# Altium PCB CH382SSP.PcbDoc
Units mil, origin at the board's own origin, x right, y up, seen from the top; angles counter-clockwise.
Board outline 3084.87 x 2354.36 mil, 2 copper layers (TopLayer, BottomLayer); 63 components, 93 nets, 329 pads, 141 vias.
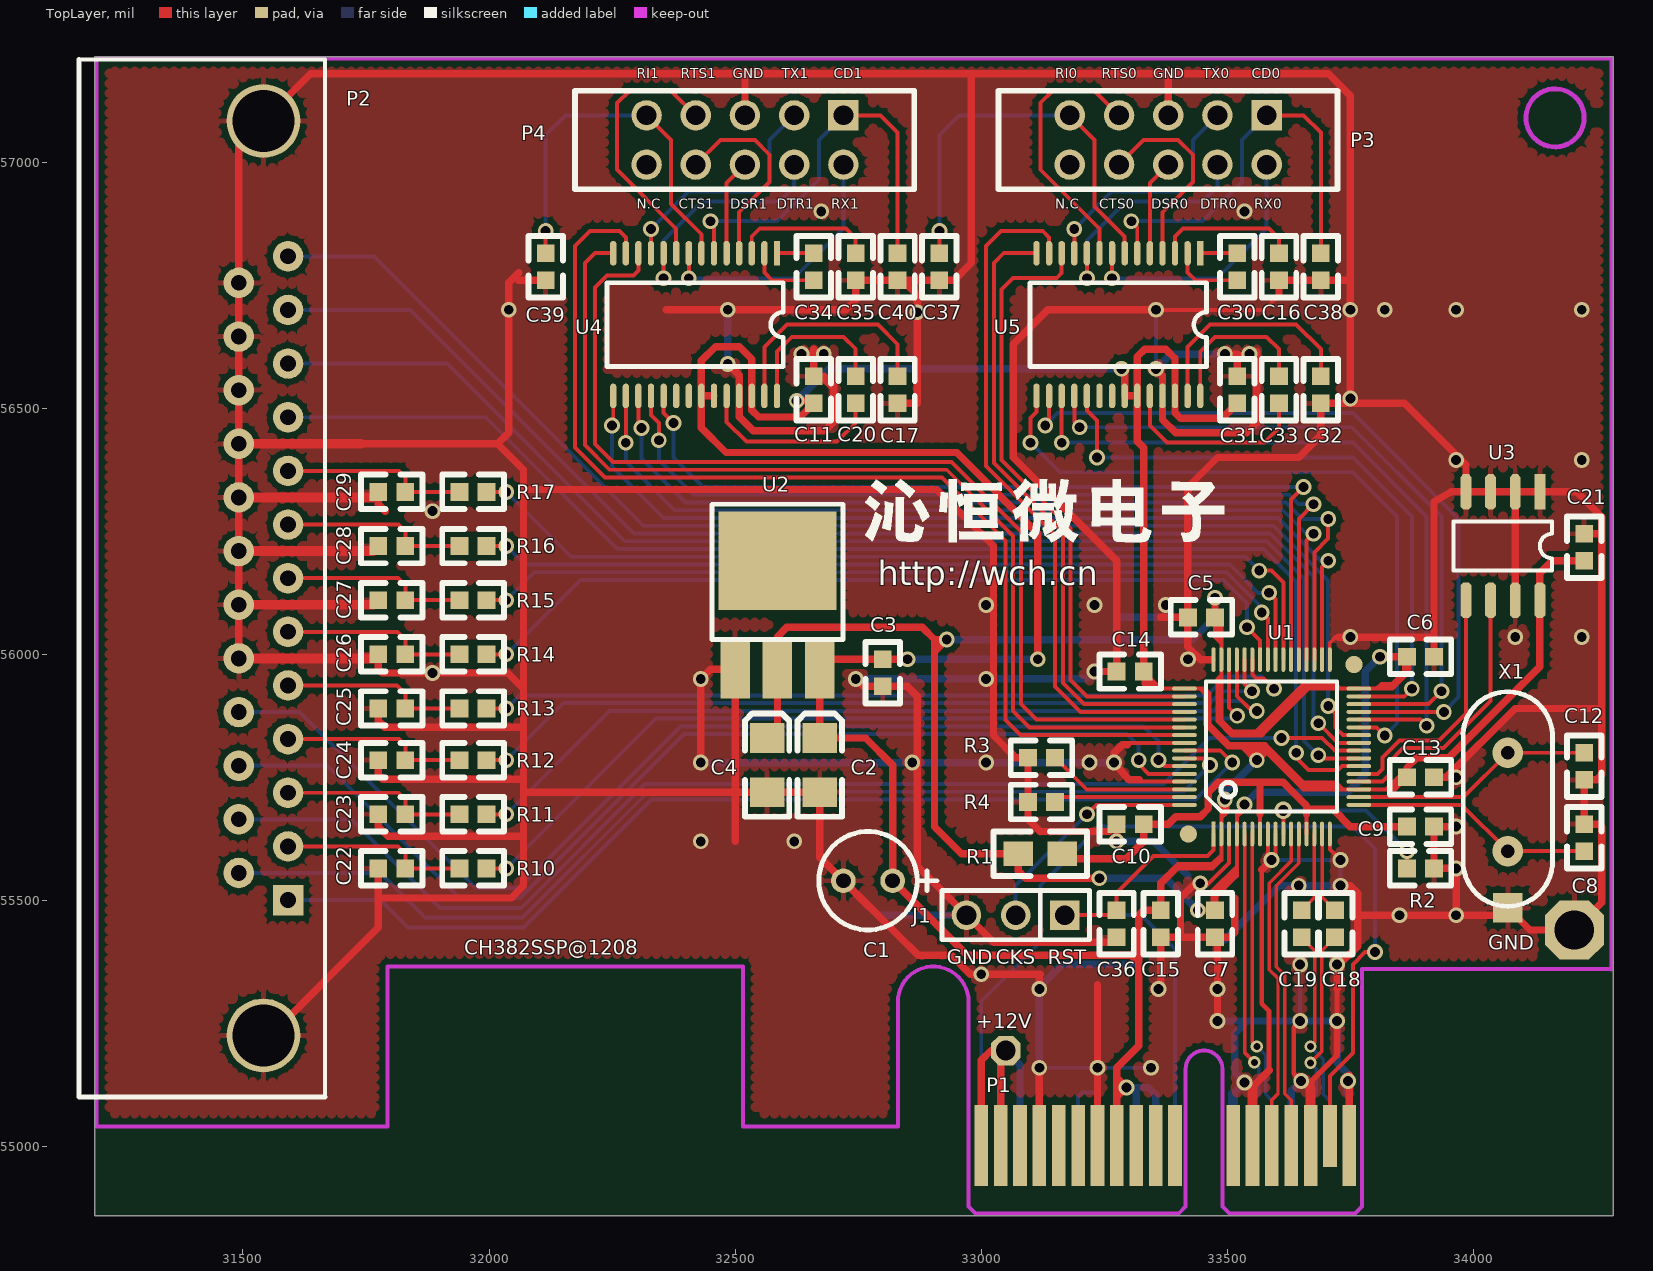
[diagram p0: TopLayer view]
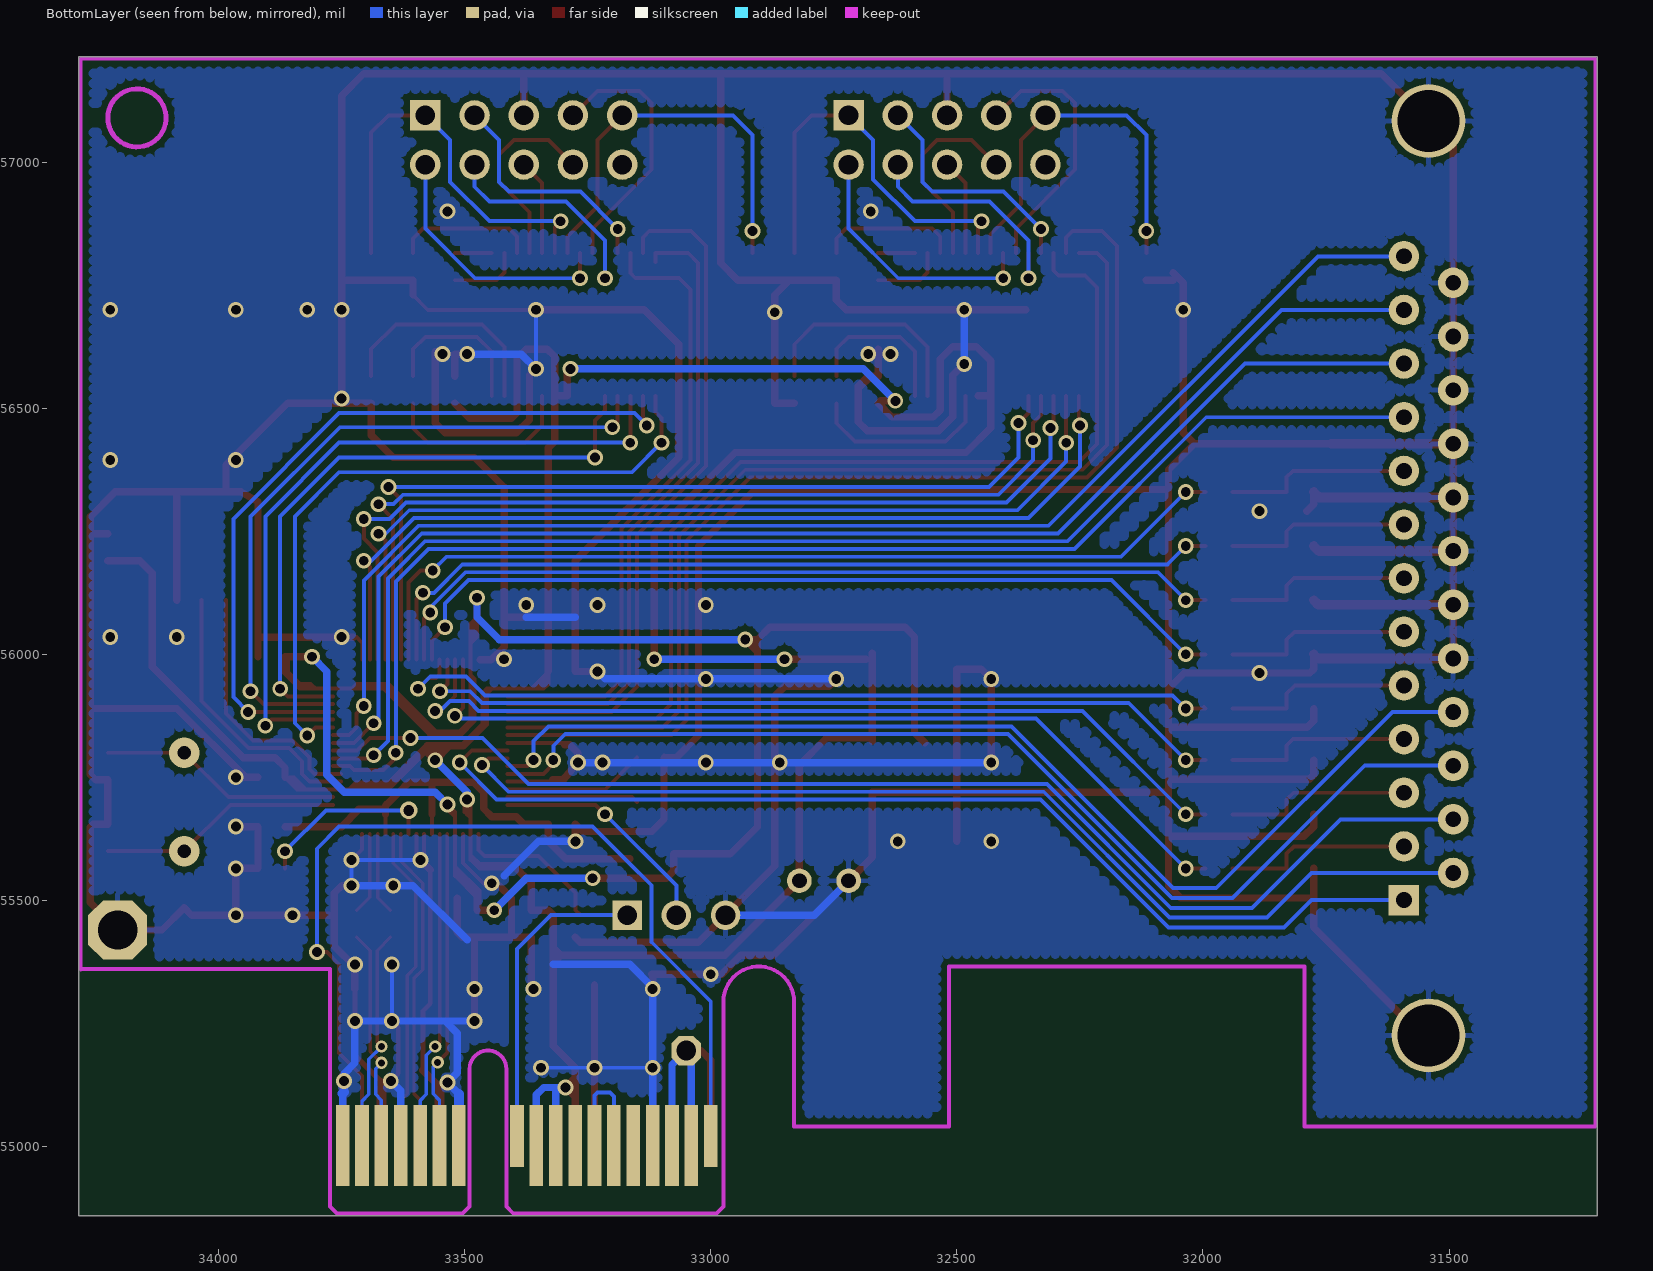
[diagram p1: BottomLayer view, seen from below]

## Layer stack, top to bottom
TopSolder: solder mask 0.4, Solder Resist, Dk 3.5
TopLayer: signal copper 1.4
Dielectric1: dielectric 12.6, FR-4, Dk 4.8
BottomLayer: signal copper 1.4
BottomSolder: solder mask 0.4, Solder Resist, Dk 3.5

## Board outline
31199.06,54859.57 34283.94,54859.57 34283.94,57213.94 31199.06,57213.94

## Design rules (kind name [scope] priority, off if disabled: settings)
Clearance Clearance_4 [(InPoly) vs InNetClass('PARTS')] p1: gap=12 ignorepadtopadclearanceinfootprint=FALSE
Clearance Clearance_2 [All vs InNetClass('PARTS')] p2: gap=7 ignorepadtopadclearanceinfootprint=FALSE
Clearance Clearance_5 [InComponent('U2')] p3: gap=15 ignorepadtopadclearanceinfootprint=FALSE
Clearance Clearance_1 [All vs (InPoly)] p4: gap=12 ignorepadtopadclearanceinfootprint=FALSE
Clearance [All] p5: gap=7.75 ignorepadtopadclearanceinfootprint=FALSE
ComponentClearance [All] p1 off: gap=10 collisioncheckmode=3 verticalgap=10 showdistances=FALSE
FabricationTestPointUsage TestPointUsage [All] p1: valid=0 allowmultiple=FALSE
FabricationTestpoint Testpoint [All] p1: side=3 testpointundercomponent=TRUE minsize=40 maxsize=100 preferedsize=60 minholesize=20 maxholesize=40 preferedholesize=32 testpointgrid=1 allowsidetop=TRUE allowsidebottom=TRUE usegrid=TRUE gridtolerance=0.01
HoleSize [All] p1 off: absolutevalues=TRUE maxlimit=120 minlimit=1 maxpercent=80.000 minpercent=20.000
PolygonConnect [All] p1: connectstyle=Relief reliefconductorwidth=10 reliefentries=4 polygonreliefangle="90 Angle" airgapwidth=10
RoutingVias RoutingVias_1 [InNetClass('PARTS')] p1: holewidth=14 width=25 viastyle="Through Hole" minholewidth=14 minwidth=25 maxholewidth=28 maxwidth=50
RoutingVias [All] p2: holewidth=24 width=40 viastyle="Through Hole" minholewidth=24 minwidth=40 maxholewidth=28 maxwidth=40
SolderMaskExpansion [All] p1: expansion=4 istentingtop=FALSE
Width Width_2 [InNet('GND')] p1: maxlimit=30 minlimit=7 preferedwidth=7.87
Width Width_4 [InNetClass('PARTS')] p2: maxlimit=15 minlimit=7 preferedwidth=7
Width Width_3 [InNetClass('VCC')] p3: maxlimit=30 minlimit=7 preferedwidth=15
Width [All] p4: maxlimit=30 minlimit=7 preferedwidth=8
26 further rules are at their usual default settings.

## Classes and differential pairs
net class VCC: 1V8 3V3 3V3AUX +5V +12 -12 NetF1_2 NetJP1_3 NetU1_7
net class PARTS: NetC18_1 NetC18_2 NetC19_1 NetC19_2 NetP1_14 NetP1_15 NetP1_23 NetP1_24

## Components (designator, comment, footprint, x,y, rotation, side; value= is the part's Value field where it differs from the comment)
C1 "100u" CD0.1 32820,55540 r180 top
C2 "10u" 3216 32672,55830 r90 top
C3 "0.1uF" 0603 32800,55990 r270 top
C4 "10u" 3216 32565,55830 r90 top
C5 "0.1uF" 0603 33475,56075 r180 top
C6 "0.1uF" 0603 33865,55995 r0 top
C7 "0.1uF" 0603 33475,55480 r270 top
C8 "27p" 0603 34225,55600 r90 top
C9 "0.1uF" 0603 33865,55650 r0 top
C10 "0.1uF" 0603 33330,55655 r180 top
C11 "0.1uF" 0603 32660,56510 r90 top
C12 "27p" 0603 34225,55800 r270 top
C13 "0.1uF" 0603 33865,55750 r0 top
C14 "0.1uF" 0603 33330,55965 r180 top
C15 "0.1uF" 0603 33365,55480 r270 top
C16 "0.1uF" 0603 33605,56815 r270 top
C17 "0.1uF" 0603 32830,56565 r270 top
C18 "0.1uF" 0603 33719,55425 r90 top
C19 "0.1uF" 0603 33651,55425 r90 top
C20 "0.1uF" 0603 32745,56565 r270 top
C21 "0.1uF" 0603 34225,56190 r90 top
C22 "100pF" 0603 31830,55565 r180 top
C23 "100pF" 0603 31830,55675 r180 top
C24 "100pF" 0603 31830,55785 r180 top
C25 "100pF" 0603 31830,55890 r180 top
C26 "100pF" 0603 31830,56000 r180 top
C27 "100pF" 0603 31830,56110 r180 top
C28 "100pF" 0603 31830,56220 r180 top
C29 "100pF" 0603 31830,56330 r180 top
C30 "0.1uF" 0603 33520,56815 r270 top
C31 "0.1uF" 0603 33520,56510 r90 top
C32 "0.1uF" 0603 33690,56565 r270 top
C33 "0.1uF" 0603 33605,56565 r270 top
C34 "0.1uF" 0603 32660,56815 r270 top
C35 "0.1uF" 0603 32745,56815 r270 top
C36 "1000p" 0603 33275,55480 r270 top
C37 "0.01uF" 0603 32915,56760 r90 top
C38 "0.01uF" 0603 33690,56760 r90 top
C39 "0.01uF" 0603 32115,56760 r90 top
C40 "0.01uF" 0603 32830,56760 r90 top
J1 "3JUMPS" SIP3 33170,55470 r180 top
P1 "PCIE1" PCIE1 33000,55001.97 r0 top locked
P2 "1284A" DB25RA/F 31591.58,55500.72 r90 top locked
P3 "CON10" IDC10 33580,57095 r270 top locked
P4 "CON10" IDC10 32720,57095 r270 top locked
R1 "0" 0805 33075,55595 r0 top
R2 "12K" 0603 33920,55565 r180 top
R3 "0" 0603 33150,55790 r180 top
R4 "NC" 0603 33150,55700 r180 top
R10 "33R" 0603 31940,55565 r0 top
R11 "33R" 0603 31940,55675 r0 top
R12 "33R" 0603 31940,55785 r0 top
R13 "33R" 0603 31940,55890 r0 top
R14 "33R" 0603 31940,56000 r0 top
R15 "33R" 0603 31940,56110 r0 top
R16 "33R" 0603 31940,56220 r0 top
R17 "33R" 0603 31940,56330 r0 top
U1 "CH382L" LQFP64 33472.01,55635 r0 top
U2 "LDO-1V8" SOT-223 32500,55970 r0 top
U3 "24C02" SOP8 34135,56330 r180 top
U4 "MAX3243" SSOP28 32585,56815 r270 top
U5 "MAX3243" SSOP28 33445,56815 r270 top
X1 "22.1184MHz" XTAL62/28 34070,55800 r180 top

## Footprints (in the part's own frame and the unit in brackets; to place one, negate y for a bottom-side part, rotate by r counter-clockwise, add the part's x,y. Pads: shape width x height; smd on the part's side, far side on the other; paste and mask are expansions set on the pad)
0603 [mil]
  rect 36x36 smd: 1(0,0) 2(55,0)
  silkscreen extent -35,-35 90,35
0805 [mil]
  rect 60x50 smd: 1(0,0) 2(90,0)
  silkscreen extent -50,-45 140,45
3216 [mil]
  rect 60x70 smd: 1(0,0) 2(-110,0)
  silkscreen extent -160,-45 50,45
CD0.1 [mil]
  round 50 hole 30: 1(0,0) 2(100,0)
  silkscreen extent -90,-100 150,100
DB25RA/F [mil]
  round 150 hole 125.98: 0(-275,50) 0(1583,50)
  rect 62x62 hole 32: 1(0,0)
  round 62 hole 32: 2(109,0) 3(218,0) 4(327,0) 5(436,0) 6(545,0) 7(654,0) 8(763,0) 9(872,0) 10(981,0) 11(1090,0) 12(1199,0) 13(1308,0) 14(55,100) 15(164,100) 16(273,100) 17(382,100) 18(491,100) 19(600,100) 20(709,100) 21(818,100) 22(927,100) 23(1036,100) 24(1145,100) 25(1254,100)
  silkscreen extent -400,-75 1708,425
IDC10 [mil]
  rect 62x62 hole 40: 1(0,0)
  round 62 hole 40: 2(100,0) 3(0,-100) 4(100,-100) 5(0,-200) 6(100,-200) 7(0,-300) 8(100,-300) 9(0,-400) 10(100,-400)
  silkscreen extent -50,-545 150,144
LQFP64 [mm]
  round 0.889 smd: 0(-1.302,0) 0(7.246,8.746)
  rect 0.203x1.27 smd: 1(0,0)
  oval 0.203x1.27 smd: 2(0.4,0) 3(0.8,0) 4(1.2,0) 5(1.6,0) 6(2,0) 7(2.4,0) 8(2.8,0) 9(3.2,0) 10(3.6,0) 11(4,0) 12(4.4,0) 13(4.8,0) 14(5.2,0) 15(5.6,0) 16(6,0) 33(6,9) 34(5.6,9) 35(5.2,9) 36(4.8,9) 37(4.4,9) 38(4,9) 39(3.6,9) 40(3.2,9) 41(2.8,9) 42(2.4,9) 43(2,9) 44(1.6,9) 45(1.2,9) 46(0.8,9) 47(0.4,9) 48(0,9)
  oval 1.27x0.203 smd: 17(7.5,1.5) 18(7.5,1.9) 19(7.5,2.3) 20(7.5,2.7) 21(7.5,3.1) 22(7.5,3.5) 23(7.5,3.9) 24(7.5,4.3) 25(7.5,4.7) 26(7.5,5.1) 27(7.5,5.5) 28(7.5,5.9) 29(7.5,6.3) 30(7.5,6.7) 31(7.5,7.1) 32(7.5,7.5) 49(-1.5,7.5) 50(-1.5,7.1) 51(-1.5,6.7) 52(-1.5,6.3) 53(-1.5,5.9) 54(-1.5,5.5) 55(-1.5,5.1) 56(-1.5,4.7) 57(-1.5,4.3) 58(-1.5,3.9) 59(-1.5,3.5) 60(-1.5,3.1) 61(-1.5,2.7) 62(-1.5,2.3) 63(-1.5,1.9) 64(-1.5,1.5)
  silkscreen extent -0.39,1.15 6.36,7.86
PCIE1 [mm]
  rect 0.7x4.2 smd: 1(0,0) 2(1,0) 3(2,0) 4(3,0) 5(4,0) 6(5,0) 7(6,0) 8(7,0) 9(8,0) 10(9,0) 11(10,0) 12(13,0) 13(14,0) 14(15,0) 15(16,0) 16(17,0) 18(19,0)
  rect 0.7x3.2 smd: 17(18,0.5)
  rect 0.7x4.2 smd far side: 19(19,0) 20(18,0) 21(17,0) 22(16,0) 23(15,0) 24(14,0) 25(13,0) 27(9,0) 28(8,0) 29(7,0) 30(6,0) 31(5,0) 32(4,0) 33(3,0) 34(2,0) 35(1,0)
  rect 0.7x3.2 smd far side: 26(10,0.5) 36(0,0.5)
  KeepOutLayer lines w0.2: -45.644,9.233 -45.644,0.983 -30.644,0.983 -30.644,9.233 -12.3,9.233 -12.3,0.983 -4.3,0.983 -4.3,7.414 cw(c-2.475,7.414) -0.65,7.414 -0.65,-3.149 -0.294,-3.504 ; -0.288,-3.517 10.194,-3.517 ; 10.194,-3.504 10.55,-3.149 10.55,3.953 cw(c11.5,3.953) 12.45,3.953 12.45,-3.146 12.806,-3.502 ; 12.808,-3.517 19.294,-3.517 ; 19.294,-3.504 19.65,-3.149 19.65,9.101
SIP3 [mil]
  rect 60x60 hole 40: 1(0,0)
  round 60 hole 40: 2(100,0) 3(200,0)
  silkscreen extent -50,-50 250,50
SOP8 [mil]
  rect 22x72 smd: 1(0,0)
  oct 22x72 smd: 2(50,0) 3(100,0) 4(150,0) 5(150,220) 6(100,220) 7(50,220) 8(0,220)
  silkscreen extent -25,60 175,160
SOT-223 [mil]
  rect 60x120 smd: 1(0,0) 2(86,0) 3(172,0)
  rect 240x200 smd: ""(86,220)
  silkscreen extent -47,60 219,335
SSOP28 [mil]
  rect 50x13 smd: 1(0,0)
  oval 50x13 smd: 2(0,-25.59) 3(0,-51.18) 4(0,-76.77) 5(0,-102.36) 6(0,-127.96) 7(0,-153.55) 8(0,-179.14) 9(0,-204.73) 10(0,-230.32) 11(0,-255.91) 12(0,-281.5) 13(0,-307.09) 14(0,-332.68) 15(290,-332.68) 16(290,-307.09) 17(290,-281.5) 18(290,-255.91) 19(290,-230.32) 20(290,-204.73) 21(290,-179.14) 22(290,-153.55) 23(290,-127.96) 24(290,-102.36) 25(290,-76.77) 26(290,-51.18) 27(290,-25.59) 28(290,0)
  silkscreen extent 60,-345 230,13
XTAL62/28 [mil]
  rect 60x60 smd: 0(0,315)
  round 62 hole 28: 1(0,0) 2(0,200)
  silkscreen extent -91,-124 91,312

## Part data
C1: library part Pro89C.tmp_100u_10
C2 C4: library part Pro89C.tmp_10u_4
C3 C5 C6 C7 C9 C10 C13 C14 C15 C21: library part Pro89C.tmp_0.1u_3
C8 C12 C36: library part Pro5B1.tmp_27p_3
C11 C16 C17 C20 C30 C31 C32 C33 C34 C35: library part CAPACITOR, "Capacitor"
C18: library part Pro89C.tmp_0.1u_70
C19: library part Pro89C.tmp_0.1u_71
C22 C23 C24 C25 C26 C27 C28 C29 C37 C38 C39 C40: library part CAP, "Capacitor"
J1: library part Pro5B1.tmp_3JUMPS_1
P1: library part Pro89C.tmp_PCIE1_69
P3 P4: "Connector"
R1: library part Pro89C.tmp_0_1
R2: library part Pro5B1.tmp_12K_15
R3 R4: library part Pro3F8.tmp_0_4
R10 R11 R12 R13 R14 R15 R16 R17: library part RES2
U1: "PCIe to 2S1P: Print Port / Parallel and Dual 16C550 UART with 256 byte FIFO"
U2: library part Pro89C.tmp_LDO-1V8_68
U3: library part Pro89C.tmp_24C02_11
X1: library part Pro5B1.tmp_22.1184MHz_4

## Free pads (board coordinates)
  oct 60x60 hole 40: 0(33050,55195)
  oct 120x120 hole 80: 0(34205,55440)

## Via types
v1: diameter 32, hole 20, TopLayer to BottomLayer, 136 vias
v2: diameter 25, hole 14, TopLayer to BottomLayer, 4 vias
v3: diameter 36, hole 22, TopLayer to BottomLayer, 1 vias

## Nets (pads, with @x,y where several pads share a name; then routed paths per layer and width w, separated by ;. In a path a pad name is that pad's centre, name@x,y a point inside that pad or via, vN(x,y) a via of type N, cw(c..) or ccw(c..) an arc to the next point about the centre after c; other vN are vias at no path point)
1V8: C4.1 C5.1 C6.1 C7.1 R1.1 U1.4 U1.32 U1.47 U2.2 | length 5719.5
  TopLayer w8: C7.1@33475,55495 33475,55505 33519.25,55549.25 33519.25,55600 ; 33475,55510 33519.25,55554.25 33519.25,55564.25 ; 33480,55900 33480,55864.44 ; 33484.26,55890.74 33484.26,55949.26 33487.76,55952.76 33487.76,55960 ; 33487.76,55946.5 33487.76,56030 ; U1.47@33487.76,56005 33487.76,56022.24 33475,56035 C5.1 ; 33509.39,55840 33487.76,55861.64 33487.76,55960 ; 33519.25,55564.3 33519.25,55669.32 ; 33519.25,55570 33519.25,55564.25 ; 33519.25,55585 33519.25,55569.25 33470,55520 33470,55485 C7.1 33475,55520 33519.25,55564.25 ; U1.4@33519.25,55650 33519.25,55679.25 v1(33535,55695) 33535,55685 33519.25,55669.25 U1.4@33519.25,55655 ; 33535,55840 33504.44,55840 33480,55864.44 ; 33545,55840 33555,55840 33655,55940 33720.28,55940 33725.28,55935 ; 33565,55840 33660,55935 33725.28,55935 ; 33570,55840 33660.28,55930.28 33730,55930.28 ; 33685,55930.28 33665.28,55930.28 33575,55840 33570,55835 33509.44,55835 33480,55864.44 ; 33837.67,55937.67 33810.89,55937.67 ; 33845,55940 33813.22,55940 33810.89,55937.67 ; 33857.61,55962.61 33859.36,55964.36 33859.36,55989.36 C6.1 ; C6.1@33865,55985 33865,55970 33825.28,55930.28 33803.5,55930.28 ; C5.1 33480,56070 33480,56037.76 33487.76,56030 ; C5.1 33487.76,56062.24 33487.76,56030 ; 33480,55864.44 33480,55950 33487.76,55957.76 33487.76,55960 ; 33725.28,55935 33730,55930.28 ; 33730,55930.28 33803.5,55930.28 ; 33803.5,55930.28 33810.89,55937.67 ; 33803.5,55930.28 33830.28,55930.28 ; 33830.28,55930.28 33835.28,55930.28 33865,55960 ; 33830.28,55930.28 33865,55965 C6.1 ; 33865,55960 33870,55965 33870,55990 C6.1 ; 33865,55960 C6.1
  TopLayer w15: C4.1@32565,55820 32586,55841 32586,56036 32605,56055 32880,56055 32905,56030 ; 32905,56005 v1(32930,56030) 32905,56030 ; v1(33240,55545) 33090,55545 33075,55560 R1.1 32960,55595 32905,55650 32905,56030 ; v1(33440,55480) C7.1 33475,55515 ; C5.1 v1(33475,56115) ; 33484.26,55890.74 33484.26,55865.14 33509.39,55840 33535,55840 33570,55840 ; v1(33810,55995) C6.1
  BottomLayer w15: v1(32930,56030) 33430,56030 33475,56075 v1(33475,56115) ; v1(33240,55545) 33375,55545 v1(33440,55480) ; v1(33535,55695) 33560,55720 33590,55720 33745,55720 33780,55755 33780,55965 v1(33810,55995)
3V3: C1.1 C2.1 C3.1 C11.1 C13.1 C14.1 C15.1 C21.1 C31.1 P1.8 P1.27 P1.28 U1.2 U1.19 U1.49 U2.3 U3.8 U4.22 U4.23 U4.26 U5.22 U5.23 U5.26 | length 9630.2
  TopLayer w8: C11.1@32655,56515 C11.1 ; 33385,55560 33399.25,55574.25 33469.25,55574.25 33487.76,55592.76 ; 33400,55570 33468.86,55570 33487.76,55588.89 ; 33445,55930.28 33455,55920.28 ; 33450,55574.25 33404.25,55574.25 33365,55535 33395,55565 33463.86,55565 ; 33460,55857.22 33460,55915 33444.72,55930.28 U1.49 ; 33465,55570 33487.76,55592.76 ; 33487.76,55605 33487.76,55592.76 ; 33487.76,55665 33487.76,55667.76 33495,55675 ; 33490,55830 33464.25,55855.75 33464.25,55920.75 33454.72,55930.28 U1.49 ; 33566.81,55813.91 33655.17,55725.55 33664.45,55725.55 ; 33576.09,55813.91 33664.45,55725.55 ; 33581.09,55813.91 33669.45,55725.55 ; 33650.02,55739.98 33720.57,55739.98 33725.55,55735 ; 33652.37,55737.63 33655,55735 ; 33655,55732 33725.55,55732 ; 33735,55725.55 33725.55,55735 ; U1.19 33840.55,55725.55 C13.1 C13.1@33854.42,55750 ; 33822.05,55725.55 33846.5,55750 C13.1@33854.42,55750 ; C14.1 33330,55960 33359.72,55930.28 33364.72,55930.28 ; C14.1 33330,55950 33349.72,55930.28 33364.72,55930.28 ; C14.1 33330,55940 33339.72,55930.28 33364.72,55930.28 ; C14.1 33364.72,55930.28 ; 33364.72,55930.28 U1.49 ; 33455,55920.28 33455,55857.27 33498.36,55813.91 33503.31,55813.91 33501.09,55813.91 33455,55860 33455,55920.28 ; 33463.86,55565 33470.46,55565 33487.76,55582.3 33487.76,55588.89 ; 33463.86,55565 33487.76,55588.89 ; 33487.76,55588.89 33487.76,55680 33487.76,55697.76 v1(33495,55705) ; 33495,55675 33500,55680 33500,55700 v1(33495,55705) ; 33495,55675 v1(33495,55705) ; 33664.45,55725.55 33725,55725.55 ; 33669.45,55725.55 33678.9,55735 33725.55,55735 ; 33669.45,55725.55 33725,55725.55 ; 33725,55725.55 33829.97,55725.55 C13.1@33854.42,55750
  TopLayer w15: U4.23 U4.22 ; v1(32625,56515) 32655,56515 C11.1 32632.29,56482.29 32547.71,56482.29 32533.82,56496.18 32533.82,56600 32508.82,56625 32460,56625 32431.45,56596.45 U4.22 ; C2.1@32672,55823 U2.3@32672,56002 ; C2.1 32765,55830 32820,55775 C1.1 32971.25,55388.75 33320,55388.75 ; U2.3@32685,55990 v1(32850,55990) ; v1(33115,55990) 33115,56245 32950,56410 32481.45,56410 32431.45,56460 U4.22 ; P1.8 33275.59,55160 33320,55204.41 33320,55388.75 ; 33275.59,55100.59 33280,55105 v1(33295,55120) ; 33275.59,55120 v1(33295,55120) ; 33275.59,55139.41 v1(33295,55120) ; v1(33285,56580) 33291.45,56573.55 U5.22 U5.23 ; 33320,55373.75 33305,55388.75 33320,55403.75 ; C14.1 33330,56420 33317.04,56432.96 U5.23 ; 33400,55570 33365,55535 C15.1 33330,55480 33320,55470 33320,55388.75 ; 33460,55857.22 33503.31,55813.91 33576.09,55813.91 ; C31.1 33490,56480 33405,56480 33393.82,56491.18 33393.82,56601.18 33375,56620 33332.04,56620 33317.04,56605 U5.23 ; 33531.09,55813.91 v1(33560,55785) ; 33550,55813.91 33550,55795 v1(33560,55785) ; 33560,55813.91 v1(33560,55785) ; 33570,55813.91 33570,55795 v1(33560,55785) ; 33580.96,55805.96 v1(33560,55785) ; C13.1 33865,55770 33885,55790 33950,55790 34135,55975 U3.8 34135,56165 34160,56190 C21.1
  BottomLayer w15: v1(32625,56515) 32690,56580 v1(33285,56580) ; v1(32850,55990) v1(33115,55990) ; v1(33295,55120) 33339.33,55120 33354.33,55105 P1.27 ; P1.28 33314.96,55119.96 ; v1(33495,55705) 33495,55720 v1(33560,55785)
+12: P1.1 P1.2 P1.34 P1.35 pad.0@33050,55195 | length 816.1
  TopLayer w15: P1.1 33000,55175 33020,55195 pad.0@33050,55195 ; P1.2 pad.0@33039.37,55184.37
  BottomLayer w15: P1.35 33039.37,55184.37 33050,55195 33078.74,55166.26 P1.34
ACK: P2.10 U1.22 | length 2685.4
  TopLayer w8: v1(33640,55800) 33640,55790 33665,55765 33725,55765 33732.8,55772.8 U1.22
  BottomLayer w8: P2.10 31993.28,56481.72 32260.98,56214.02 33573.71,56214.02 33640,56147.73 v1(33640,55800)
AFD: P2.14 U1.58 | length 2197.1
  TopLayer w8: U1.58 33451.46,55788.54 v1(33465,55775)
  BottomLayer w8: P2.14 31779.28,55555.72 31870,55465 32067.73,55465 32323.48,55720.75 33410.75,55720.75 v1(33465,55775)
BUSY: P2.11 U1.23 | length 2715.7
  TopLayer w8: v1(33685,55795) 33691.46,55788.54 U1.23
  BottomLayer w8: P2.11 31914.28,56590.72 32275.24,56229.76 33580.69,56229.76 33645,56165.46 33645,56165 33655.75,56154.25 33655.75,55824.25 33690,55790 v1(33685,55795)
CKS: J1.2 U1.64 | length 470.9
  TopLayer w8: v1(33215,55675) 33234.06,55694.06 U1.64
  BottomLayer w8: J1.2 33070,55530 v1(33215,55675)
CTS0: U1.31 U5.19 | length 1287.2
  TopLayer w8: U5.19 33214.68,56495 33235,56474.68 v1(33235,56400) ; U1.31 33859.53,55914.53 v1(33875,55930)
  BottomLayer w8: v1(33235,56400) 33755,56400 33875,56280 v1(33875,55930)
CTS1: U1.38 U4.19 | length 1799.5
  TopLayer w8: U4.19 32354.68,56490.32 v1(32375,56470) ; U1.38 33629.49,56314.49 v1(33655,56340)
  BottomLayer w8: v1(32375,56470) 32375,56400 32435,56340 v1(33655,56340)
D0: R10.2 U1.46 | length 1784.6
  TopLayer w8: R10.2 v1(32035,55565) ; U1.46 33503.5,55901.5 33503.5,55891.5 v1(33520,55875) v1@33530,55875
  BottomLayer w8: v1(32035,55565) 32339.25,55869.25 33514.25,55869.25 v1(33520,55875)
D1: R11.2 U1.45 | length 1795.6
  TopLayer w8: R11.2 v1(32035,55675) ; U1.45 33519.25,55930.75 33519.25,55915.75 33550,55885 v1(33560,55885)
  BottomLayer w8: v1(32035,55675) 32245,55885 33471.52,55885 33491.52,55905 33530,55905 33550,55885 v1(33560,55885)
D2: R12.2 U1.44 | length 1683.5
  TopLayer w8: R12.2 v1(32035,55785) ; U1.44 33535,55959.23 33535,55940 v1(33550,55925)
  BottomLayer w8: v1(32035,55785) 32150.75,55900.75 33465,55900.75 33489.25,55925 v1(33550,55925)
D3: R13.2 U1.43 | length 1727.8
  TopLayer w8: R13.2@31997.85,55892.85 R13.2 v1(32035,55890) ; U1.43 33550.75,55959.25 33558.63,55951.37 33563.63,55951.37 33573.63,55951.37 v1(33595,55930)
  BottomLayer w8: v1(32035,55890) 32061.5,55916.5 33406.5,55916.5 33446.5,55916.5 33458.48,55916.5 33496.98,55955 33570,55955 v1(33595,55930)
D4: R14.2 U1.42 | length 1791.3
  TopLayer w8: R14.2 v1(32035,56000) ; v1(33540,56055) 33566.5,56028.5 ; 33566.5,56028.5 U1.42 33566.5,56028.5
  BottomLayer w8: v1(32035,56000) 32186.02,56151.02 33491.95,56151.02 33540,56102.98 v1(33540,56055)
D5: R15.2 U1.41 | length 1739.1
  TopLayer w8: R15.2 v1(32035,56110) ; v1(33570,56085) 33582.24,56072.76 U1.41
  BottomLayer w8: v1(32035,56110) 32091.77,56166.77 33488.23,56166.77 33498.48,56166.77 33570,56095.25 v1(33570,56085)
D6: R16.2 U1.40 | length 1770.4
  TopLayer w8: R16.2 v1(32035,56220) ; v1(33585,56125) 33597.99,56112.01 U1.40
  BottomLayer w8: v1(32035,56220) 32072.48,56182.52 33505,56182.52 33562.52,56125 v1(33585,56125)
D7: R17.2 U1.39 | length 1851.8
  TopLayer w8: R17.2 v1(32035,56330) ; v1(33565,56170) 33590,56170 33613.74,56146.26 U1.39
  BottomLayer w8: v1(32035,56330) 32166.73,56198.27 33536.73,56198.27 v1(33565,56170)
DCD0: U1.28 U5.17 | length 1466.4
  TopLayer w8: v1(33163.5,56430) U5.17 ; U1.28 33892.72,55867.28 v1(33905,55855)
  BottomLayer w8: v1(33163.5,56430) 33755,56430 33905,56280 v1(33905,55855)
DCD1: U1.35 U4.17 | length 1873.2
  TopLayer w8: U4.17 32303.5,56466.5 v1(32310,56460) ; U1.35 33676.73,56206.73 33705,56235 v1(33705,56275)
  BottomLayer w8: v1(32310,56460) 32310,56397.76 32399.25,56308.5 33619.22,56308.5 33652.73,56275 v1(33705,56275)
DSR0: U1.30 U5.18 | length 1411.8
  TopLayer w8: U5.18 33189.09,56472.31 v1(33200,56461.4) ; U1.30 33908.78,55898.78 v1(33935,55925)
  BottomLayer w8: v1(33200,56461.4) 33753.6,56461.4 33935,56280 v1(33935,55925)
DSR1: U1.37 U4.18 | length 1831.9
  TopLayer w8: U4.18 32329.09,56485.91 32345,56470 v1(32345,56435) ; U1.37 33645.24,56275.24 v1(33675,56305)
  BottomLayer w8: v1(32345,56435) 32345,56395 32415.75,56324.25 33625.75,56324.25 33645,56305 v1(33675,56305)
DTR0: U1.52 U5.13 | length 1415.2
  TopLayer w8: U5.13 33137.91,56847.09 33125,56860 33040,56860 33010,56830 33010,56382.22 33150,56242.22 33150,55935 33201.97,55883.03 U1.52
DTR1: U1.55 U4.13 | length 2256.1
  TopLayer w8: U4.13 32277.91,56847.09 32265,56860 32205,56860 32175,56830 32175,56420 32235.74,56359.26 32920.74,56359.26 33049.25,56230.75 33049.25,55866.54 33080,55835.79 U1.55
ERR: P2.15 U1.24 | length 2503.7
  TopLayer w8: v1(33610,55830) 33692.73,55830 33718.44,55804.29 U1.24
  BottomLayer w8: P2.15 31720.28,55664.72 31900,55485 32065.46,55485 32316.95,55736.5 33370,55736.5 33463.5,55830 v1(33610,55830)
GND: C1.2 C2.2 C3.2 C4.2 C5.2 C6.2 C7.2 C8.2 C9.2 C10.2 C11.2 C12.2 C13.2 C14.2 C15.2 C16.2 C17.2 C21.2 C22.2 C23.2 C24.2 C25.2 C26.2 C27.2 C28.2 C29.2 C31.2 C32.2 C35.2 C36.2 C37.1 C38.1 C39.1 C40.1 J1.3 P1.4 P1.7 P1.13 P1.16 P1.18 P1.19 P1.22 P1.25 P1.33 P2.0 P2.18 P2.19 P2.20 P2.21 P2.22 P2.23 P2.24 P2.25 P3.5 P4.5 pad.0@34205,55440 R2.1 R3.2 R4.2 U1.3 U1.8 U1.9 U1.16 U1.33 U1.48 U1.56 U1.61 U2.1 U3.1 U3.2 U3.3 U3.4 U3.7 U4.25 U5.25 X1.0 | length 31361.4
  TopLayer w7.87: U1.33 33708.23,56023.23 33720,56035 33726.73,56035
  TopLayer w8: R3.2 R3.2@33095,55795 ; 33290.04,55820.04 U1.56 ; 33303.7,55741.3 U1.61 ; v1(33355,56700) 33575,56700 33605,56730 ; v1@33440,55535 33457.73,55530 33503.5,55575.78 U1.3 ; 33520,56610 v1(33545,56610) ; U1.8 33582.24,55589.76 v1(33590,55582) 33597.99,55589.99 U1.9 ; U1.16 33708.23,55603.77 v1(33730,55582)
  TopLayer w10: 33570,55562 33570,55290 33585,55275 33585,55155 ; v1(33648,55255) 33635,55242 33635,55148 v1(33650,55133) 33666.31,55133 ; 33723,55189.69 33723,55320
  TopLayer w12: 33670,55131.91 33723,55184.91 v1(33723,55255)
  TopLayer w15: P2.18 31491.58,57033.72 31637.87,57180 33635,57180 33705,57180 33750,57135 33750,56760 ; P2.0@31545,55215 31775,55445 C22.2 ; 31740,56427.72 32017.28,56427.72 ; C29.2@31768.94,56323.94 C29.2 31775,56305 31789.06,56290.94 ; C28.2@31769.94,56214.94 C28.2 ; C27.2@31770.94,56105.94 C27.2 ; C26.2@31771.94,55996.94 C26.2 31775,55970 31783,55962 32038,55962 32070,55930 ; 31775,55505 32045,55505 32070,55530 32070,56375 32017.28,56427.72 ; C23.2 31775,55650 31795,55630 32070,55630 ; C24.2 31775,55755 31784.06,55745.94 32070,55745.94 ; C25.2 31775,55865 31788,55852 32068,55852 32070,55854 ; 32060,56760 C39.1 ; 32060,56775 32040,56755 v1(32040,56700) 32040,56450.43 32017.28,56427.72 ; 32070,55720 C2.2 32672,55588 C1.2 32830,55430 32871.7,55388.3 32939.53,55388.3 32977.83,55350 ; 32070,56335 32910,56335 33025,56220 33025,55835 33070,55790 R3.2 33095,55665 33120,55640 33260,55640 C10.2 v1(33275,55620) ; 32360,56700 32725,56700 32745,56720 C35.2 C40.1@32840,56760 ; v1(32430,55780) v1(32430,55950) 32450,55970 U2.1 32500,55720 ; v1(32485,56590) 32508.23,56566.77 32508.23,56482.89 32537.11,56454 32682,56454 32700,56472 32700,56540 32675,56565 C11.2 ; 32500,55620 32500,55780 ; P4.5 32520,57180 ; v1(32635,56610) v1(32680,56610) ; 32660,56620 C11.2 ; C2.2@32665,55720 C2.2@32668.5,55716.5 ; 32700,56545 32680,56565 C11.2 ; v1(32745,55950) 32760,55935 C3.2 32850,55935 32870,55915 ; C17.2 32870,56510 32870,56730 C40.1@32840,56760 ; v1@32870,55780 32870,55915 ; 32980,57180 32980,56795 32945,56760 C37.1 C40.1@32840,56760 ; v1(33118.11,55320) 33118.11,55348.11 ; v1(33230,55965) C14.2 33275,56190 33065,56400 33065,56630 33135,56700 v1(33355,56700) ; P1.7 33236.22,55328.78 ; C36.2 33265,55415 33025,55415 J1.3 32870,55570 32870,55915 ; 33296.5,55816.54 33286.54,55816.54 33270,55800 v1(33270,55780) 33300.2,55744.8 33321.5,55744.8 ; v1(33355,56580) 33368.23,56566.77 U5.25 33368.23,56476.77 33395,56450 33540,56450 33560,56470 v1@33560,56615 ; v1(33360,55320) 33365,55325 C15.2 33505,55425 33515,55435 33515,55505 ; 33365,56075 C5.2 ; P3.5 33380,57180 ; 33405,55425 33405,55505 33430,55530 v1@33440,55535 ; U1.48@33468.51,55989.33 33445.67,55989.33 33420,56015 33420,56340 33480,56400 33645,56400 33690,56445 C32.2 33860,56510 33985,56385 U3.4 ; C7.2 33480,55420 v1(33480,55255) ; v1(33495,56610) 33520,56610 C31.2 ; P1.13 33551.18,55110 ; 33551.18,55121.18 33585,55155 ; 33570,55562 v1(33590,55582) ; 33605,56730 C16.2 33680,56760 33750,56760 ; P1.16 33669.29,55113.71 ; 33670,55110 33670,55131.91 ; 33723,55320 33723,55365.22 33765,55407.22 33765,55515 33750,55530 v1(33730,55530) ; 33726.73,56035 33920,56035 ; P1.18 v1@33748.03,55144.97 ; v1@33750,56515 33750,56760 ; 33765,55470 v1(33850,55470) v1(33965,55470) ; C6.2 33920,56310 33955,56330 34210,56330 34260,56280 ; 33947.17,55750 C13.2 ; v1@33955,55750 C13.2 ; v1(33965,55650) C9.2 R2.1 v1(33965,55565) v1(33965,55470) ; v1(33965,55750) C13.2 ; U3.7 U3.2 ; C21.2 34260.82,56245 ; 34260.82,55890 34105,55890 34085,55890 33945,55750 ; 34260.82,56279.18 34260.82,55755.82 34250,55745 C12.2 C8.2 34255,55655 34260.82,55649.18 34260.82,55539.18 34260.82,55495.82 34205,55440 34115,55440 X1.0 34055,55470 v1(33965,55470) ; 32977.83,55350 33120,55350 32977.83,55350 ; C13.2 33945,55750 ; C13.2 33945,55750 ; P1.4 v1(33118.11,55160) P1.4
  TopLayer w20: P2.18 31766.72,55991.72 C26.2 ; P2.19 31765.72,56100.72 C27.2 ; P2.20 31764.72,56209.72 C28.2 ; P2.21 31763.72,56318.72 C29.2 ; P2.22 31740,56427.72 ; P1.13 33551.18,55121.18 ; P1.16 33669.29,55119.29
  BottomLayer w8: 33118.11,55125 v1(33118.11,55160) v1(33345,55160) ; v1(33355,56580) v1@33355,56710 ; v1(33590,55582) v1(33730,55582) v1(33730,55530) ; v1(33648,55255) v1(33648,55370)
  BottomLayer w15: v1(32430,55780) v1(33270,55780) ; v1(32485,56590) v1(32485,56700) ; C1.2 32790,55470 J1.3 ; v1(32745,55950) 33215,55950 v1(33230,55965) ; P1.33 33118.11,55143.11 ; v1(33118.11,55160) 33118.11,55323.11 33165,55370 33320,55370 ; v1(33275,55620) 33350,55620 33420,55550 ; 33275,56075 33375,56075 ; v1(33355,56580) 33385,56610 v1(33495,56610) ; v1(33480,55255) 33540,55255 ; 33495,55420 33605,55530 v1(33730,55530) ; 33511.84,55106.84 v1(33535,55130) 33515,55150 33515,55230 33540,55255 ; P1.22 33629.92,55112.92 v1(33650,55133) ; 33745,55111 33745,55148 33723,55170 v1(33723,55255) 33540,55255 ; P1.19 33748.03,55107.97
  BottomLayer w20: P1.25 33511.84,55106.84 ; 33745,55111 33748.03,55107.97
  other v1: 33745,55133 33236.22,55160 33480,55320 33000,55350 33723,55370 33645,55530 33445,55535 32430,55620 32620,55620 32860,55780 33010,55780 33220,55780 33010,55950 31885,55962 33420,55990 33750,56035 34085,56035 34220,56035 33010,56100 33230,56100 33375,56100 31885,56290.94 33965,56395 34220,56395 33750,56520 32870,56695 33750,56700 33820,56700 33965,56700 34220,56700 32675,56900 33535,56900
INIT: P2.16 U1.60 | length 2225.3
  TopLayer w8: v1(33320,55785) 33320,55777.05 33340,55757.05 U1.60
  BottomLayer w8: P2.16 31671.28,55773.72 31940,55505 32063.19,55505 32395.94,55837.76 33295.75,55837.76 33320,55813.5 v1(33320,55785)
NCD0: C38.2 P3.1 U5.6 | length 853.3
  TopLayer w8: v1(33305,56880) 33317.04,56867.96 U5.6 ; P3.1 33655,57095 33690,57060 C38.2
  BottomLayer w8: v1(33305,56880) 33450,56880 33530,56960 33530,57045 P3.1
NCD1: C40.2 P4.1 U4.6 | length 843.3
  TopLayer w8: v1(32450,56880) 32457.04,56872.96 32457.04,56845 U4.6 ; P4.1 32795,57095 32830,57060 C40.2
  BottomLayer w8: v1(32450,56880) 32585,56880 32670,56965 32670,57045 P4.1
NCTS0: P3.8 U5.4 | length 408.7
  TopLayer w8: P3.8 33330,57045 33400,57045 33430,57015 33430,56960 33368.23,56898.23 U5.4
NCTS1: P4.8 U4.4 | length 408.7
  TopLayer w8: P4.8 32470,57045 32540,57045 32570,57015 32570,56960 32508.23,56898.23 U4.4
NDSR0: P3.6 U5.5 | length 195.5
  TopLayer w8: U5.5 33342.64,56957.64 P3.6
NDSR1: P4.6 U4.5 | length 195.5
  TopLayer w8: U4.5 32482.64,56957.64 P4.6
NDTR0: P3.4 U5.10 | length 483
  TopLayer w8: v1(33214.68,56764.14) U5.10
  BottomLayer w8: v1(33214.68,56764.14) 33214.68,56840.59 33294.09,56920 33450,56920 33480,56950 P3.4
NDTR1: P4.4 U4.10 | length 483
  TopLayer w8: v1(32354.68,56764.14) U4.10
  BottomLayer w8: v1(32354.68,56764.14) 32354.68,56840.59 32434.09,56920 32590,56920 32620,56950 P4.4
NetC8_1: C8.1 U1.17 X1.2 | length 496.7
  TopLayer w8: U1.17 33975.94,55694.06 X1.2 C8.1
NetC16_1: C16.1 U5.3 | length 290
  TopLayer w8: U5.3 33393.82,56848.82 33410,56865 33585,56865 33605,56845 C16.1
NetC18_1: C18.1 P1.21 | length 453.6
  TopLayer w7: v2(33669,55170) 33692,55193 33692,55398 C18.1
  BottomLayer w7: v2(33669,55170) 33681,55158 33681,55106 33669.29,55094.29 P1.21
NetC18_2: C18.2 U1.15 | length 166
  TopLayer w7: U1.15 33692.48,55506.52 C18.2
NetC19_1: C19.1 P1.20 | length 454.4
  TopLayer w7: C19.1 33678,55398 33678,55212 v2(33669,55203)
  BottomLayer w7: v2(33669,55203) 33695,55177 33695,55106 33708.66,55092.34 P1.20
NetC19_2: C19.2 U1.14 | length 165.7
  TopLayer w7: C19.2 33676.73,55505.73 U1.14
NetC30_1: C30.1 U5.1 | length 75
  TopLayer w8: U5.1 C30.1
NetC30_2: C30.2 U5.2 | length 146.5
  TopLayer w8: U5.2 33419.41,56775.59 33435,56760 C30.2
NetC34_1: C34.1 U4.1 | length 75
  TopLayer w8: U4.1 C34.1
NetC34_2: C34.2 U4.2 | length 146.5
  TopLayer w8: U4.2 32559.41,56775.59 32575,56760 C34.2
NetC35_1: C35.1 U4.3 | length 290
  TopLayer w8: U4.3 32533.82,56848.82 32550,56865 32725,56865 32745,56845 C35.1
NetP1_14: P1.14 U1.11 | length 663.7
  TopLayer w7: P1.14 33590.55,55094.55 33603,55107 33603,55341.7 33585.5,55359.2 33585.5,55535.3 33629.49,55579.29 U1.11
NetP1_15: P1.15 U1.12 | length 664.6
  TopLayer w7: P1.15 33629.92,55094.08 33617,55107 33617,55347.5 33599.5,55365 33599.5,55529.5 33645.24,55575.24 U1.12
NetP1_17: P1.17 P1.36 | length 1941.6
  TopLayer w8: P1.17@33710.31,55023.3 P1.17 33708.66,55143.36 33755.18,55189.88 33755.18,55198.18 33755.18,55370.18 33780,55395 v1(33800,55395)
  BottomLayer w8: P1.36 33000,55295 33120,55415 33120,55530 33170,55580 33240,55650 33755,55650 33800,55605 v1(33800,55395)
NetP1_23: P1.23 U1.6 | length 649.5
  TopLayer w7: U1.6 33550.75,55212.25 v2(33560,55203)
  BottomLayer w7: v2(33560,55203) 33578,55185 33578,55106 33590.55,55093.45 P1.23
NetP1_24: P1.24 U1.5 | length 650.4
  TopLayer w7: U1.5 33535,55191 v2(33555,55171)
  BottomLayer w7: P1.24 33551.18,55094.18 33564,55107 33564,55162 v2(33555,55171)
NetP1_30: P1.30 P1.31 | length 251
  BottomLayer w8: P1.31@33196.85,55000 33196.85,55101.85 33205,55110 33230,55110 33236.22,55103.78 P1.30@33236.22,55000
NetU1_7: C9.1 C10.1 R1.2 U1.7 U1.13 | length 999.4
  TopLayer w8: U1.7 33566.5,55675 ; U1.13 33660.98,55675
  TopLayer w15: R1.2@33165,55585 33295,55585 33330,55620 C10.1 33380,55655 33395,55670 33445,55670 33461.65,55686.65 33461.65,55720 33481.65,55740 33545,55740 33613.5,55740 33633.5,55720 33658.5,55695 33660.98,55692.52 33660.98,55675 ; 33566.5,55675 33566.5,55720 33566.5,55738.5 ; 33660.98,55685 33715,55685 33750,55650 C9.1
NetU1_10: R2.2 U1.10 | length 385.6
  TopLayer w8: U1.10 v3(33613.74,55682.99) ; R2.2 v1(33865,55600)
  BottomLayer w8: v3(33613.74,55682.99) 33772.01,55682.99 ; 33755,55682.99 33782.01,55682.99 v1(33865,55600)
NetU1_62: R3.1 U1.62 | length 289.6
  TopLayer w8: R3.1 33214.45,55725.55 U1.62
NetU1_63: R4.1 U1.63 | length 267
  TopLayer w8: R4.1 33159.8,55709.8 U1.63
NetU4_24: C20.2 U4.24 | length 387.5
  TopLayer w8: U4.24 32482.64,56472.36 32523,56432 32707,56432 32745,56470 C20.2
NetU4_27: C17.1 U4.27 | length 470.5
  TopLayer w8: U4.27 32559.41,56624.41 32605,56670 32790,56670 32830,56630 C17.1
NetU4_28: C20.1 U4.28 | length 327.8
  TopLayer w8: U4.28 32585,56615 32615,56645 32720,56645 32745,56620 C20.1
NetU5_24: C33.2 U5.24 | length 399.3
  TopLayer w8: U5.24 33342.64,56465 33377.64,56430 33575,56430 33605,56460 C33.2
NetU5_27: C32.1 U5.27 | length 464.6
  TopLayer w8: U5.27 33419.41,56624.41 33465,56670 33640,56670 33690,56620 C32.1
NetU5_28: C33.1 U5.28 | length 327.8
  TopLayer w8: U5.28 33445,56615 33475,56645 33580,56645 33605,56620 C33.1
NetX1_1: C12.1 U1.18 X1.1 | length 495.1
  TopLayer w8: U1.18 33979.8,55709.8 X1.1 C12.1
NRI0: C37.2 P3.9 U5.7 | length 847.7
  TopLayer w8: C37.2 v1(32915,56860) ; P3.9 33230,57045 33230,56910 33291.45,56848.55 33291.45,56845 U5.7
  BottomLayer w8: v1(32915,56860) 32915,57055 32955,57095 P3.9
NRI1: C39.2 P4.9 U4.7 | length 787.7
  TopLayer w8: C39.2 v1(32115,56860) ; P4.9 32370,57045 32370,56930 32370,56915 32431.45,56853.55 U4.7
  BottomLayer w8: v1(32115,56860) 32115,57055 32155,57095 P4.9
NRTS0: P3.7 U5.9 | length 545.9
  TopLayer w8: U5.9 33240.27,56864.73 33120,56985 33120,57120 33145,57145 33230,57145 P3.7
NRTS1: P4.7 U4.9 | length 545.9
  TopLayer w8: U4.9 32380.27,56864.73 32260,56985 32260,57120 32285,57145 32330,57145 32370,57145 P4.7
NRX0: P3.2 U5.8 | length 536.8
  TopLayer w8: v1(33265.86,56764.14) U5.8
  BottomLayer w8: v1(33265.86,56764.14) 33479.14,56764.14 33580,56865 P3.2
NRX1: P4.2 U4.8 | length 536.8
  TopLayer w8: v1(32405.86,56764.14) U4.8
  BottomLayer w8: v1(32405.86,56764.14) 32619.14,56764.14 32720,56865 P4.2
NTX0: P3.3 U5.11 | length 485.4
  TopLayer w8: U5.11 v1(33189.09,56864.09)
  BottomLayer w8: v1(33189.09,56864.09) 33265,56940 33410,56940 33430,56960 33430,57045 P3.3
NTX1: P4.3 U4.11 | length 485.4
  TopLayer w8: U4.11 v1(32329.09,56864.09)
  BottomLayer w8: v1(32329.09,56864.09) 32405,56940 32550,56940 32570,56960 32570,57045 P4.3
PD0: C22.1 P2.2 R10.1 | length 384.5
  TopLayer w8: P2.2 31815.28,55609.72 31830,55595 C22.1 R10.1
PD1: C23.1 P2.3 R11.1 | length 384.1
  TopLayer w8: P2.3 31816.28,55718.72 31830,55705 C23.1 R11.1
PD2: C24.1 P2.4 R12.1 | length 383.7
  TopLayer w8: P2.4 31817.28,55827.72 31830,55815 C24.1 R12.1
PD3: C25.1 P2.5 R13.1 | length 385.3
  TopLayer w8: P2.5 31813.28,55936.72 31830,55920 C25.1 R13.1
PD4: C26.1 P2.6 R14.1 | length 384.9
  TopLayer w8: P2.6 31814.28,56045.72 31830,56030 C26.1 R14.1
PD5: C27.1 P2.7 R15.1 | length 384.5
  TopLayer w8: P2.7 31815.28,56154.72 31830,56140 C27.1 R15.1
PD6: C28.1 P2.8 R16.1 | length 384.1
  TopLayer w8: P2.8 31816.28,56263.72 31830,56250 C28.1 R16.1
PD7: C29.1 P2.9 R17.1 | length 383.7
  TopLayer w8: P2.9 31817.28,56372.72 31830,56360 C29.1 R17.1
PE: P2.12 U1.25 | length 2708.6
  TopLayer w8: v1(33685,55860) 33724.96,55820.04 U1.25
  BottomLayer w8: P2.12 31840.28,56699.72 32294.49,56245.51 33587.22,56245.51 33675,56157.73 33675,55870 v1(33685,55860)
RI0: U1.29 U5.16 | length 1579.8
  TopLayer w8: v1(33130,56465) 33137.91,56472.91 U5.16 ; U1.29 v1(33940,55883.03)
  BottomLayer w8: v1(33130,56465) 33155,56490 33755,56490 33970,56275 33970,55913.03 v1(33940,55883.03)
RI1: U1.36 U4.16 | length 1852.4
  TopLayer w8: v1(32277.91,56430) U4.16 ; U1.36 33660.98,56230.98 v1(33675,56245)
  BottomLayer w8: v1(32277.91,56430) 32277.91,56392.09 32377.24,56292.76 33612.7,56292.76 33660.46,56245 v1(33675,56245)
RST#: C36.1 J1.1 P1.26 U1.1 | length 1061.7
  TopLayer w8: J1.1 33265,55470 C36.1 33275,55515 33350,55590 33460,55590 33472.01,55602.01 U1.1
  BottomLayer w8: J1.1 33220,55470 33325,55470 33393.7,55401.3 P1.26@33393.7,55001.97
RTS0: U1.51 U5.14 | length 1288.9
  TopLayer w8: U5.14@33112.32,56797.32 U5.14 33045.75,56815 33025.75,56795 33025.75,56388.74 33165.75,56248.74 33165.75,55941.52 33208.49,55898.78 U1.51
RTS1: U1.54 U4.14 | length 2099
  TopLayer w8: U4.14 32215,56815 32195,56795 32195,56425 32245,56375 32930,56375 33065,56240 33065,55885 33098.46,55851.54 U1.54
RXD0: U1.27 U5.15 | length 1422.2
  TopLayer w8: v1(33100,56430) 33100,56480 33112.32,56492.32 U5.15 ; U1.27 33803.46,55851.54 v1(33820,55835)
  BottomLayer w8: v1(33100,56430) 33160,56370 33755,56370 33845,56280 33845,55860 v1(33820,55835)
RXD1: U1.34 U4.15 | length 1884.8
  TopLayer w8: v1(32250,56465) 32252.32,56467.32 U4.15 ; U1.34 33692.48,56177.48 v1(33705,56190)
  BottomLayer w8: v1(32250,56465) 32250,56381.26 32354.25,56277.01 33602.99,56277.01 33690,56190 v1(33705,56190)
SCL: U1.20 U3.6 | length 571.4
  TopLayer w8: U1.20@33751.54,55741.3 33815,55741.3 33830.75,55757.05 33830.75,55782.8 33857.2,55809.25 33939.25,55809.25 34035,55905 U3.6
SDA: U1.21 U3.5 | length 527.8
  TopLayer w8: U1.21@33751.54,55757.05 33805,55757.05 33815,55767.05 33815,55790 33850,55825 33930,55825 33985,55880 U3.5
SELT: P2.13 U1.26 | length 2745.2
  TopLayer w8: v1(33705,55895) 33720,55880 33720,55850.79 33735,55835.79 U1.26
  BottomLayer w8: P2.13 31766.28,56808.72 32313.74,56261.26 33593.74,56261.26 33705,56150 v1(33705,55895)
SIN: P2.17 U1.59 | length 2261.6
  TopLayer w8: v1(33360,55785) 33372.2,55772.8 U1.59
  BottomLayer w8: P2.17 31615.22,55882.72 31972.94,55525 32060.92,55525 32389.42,55853.5 33330,55853.5 33360,55823.5 v1(33360,55785)
STB: P2.1 U1.57 | length 2187.4
  TopLayer w8: U1.57 33485.71,55804.29 v1(33510,55780)
  BottomLayer w8: P2.1 31779.74,55500.72 31835.46,55445 32070,55445 32330,55705 33435,55705 v1(33510,55780)
TXD0: U1.50 U5.12 | length 1272.7
  TopLayer w8: U5.12 33163.5,56775 33153.5,56765 33065,56765 33041.5,56741.5 33041.5,56395.27 33181.5,56255.27 33181.5,55948.05 33215.01,55914.53 U1.50
TXD1: U1.53 U4.12 | length 2090.7
  TopLayer w8: U4.12 32303.5,56780 32293.5,56770 32240,56770 32215,56745 32215,56427.27 32251.52,56390.75 32939.25,56390.75 33080.75,56249.25 33080.75,55899.25 33112.72,55867.28 U1.53
pads on no net: P1.3 P1.5 P1.6 P1.9 P1.10 P1.11 P1.12 P1.29 P1.32 P3.10 P4.10 U1.0 U2. U4.20 U4.21 U5.20 U5.21

## Polygon pours and split planes (outlines as drawn)
GND on TopLayer "TopLayer-GND" (hatched 90Degree grid 20 track 20, remove dead copper, pour order 0): 31205,57210 31205,55040 31795,55040 31795,55365 32515,55365 32515,55040 32830,55040 32830,55365 32975,55365 32975,55110 33415,55110 33415,55195 33490,55195 33490,55110 33775,55110 33775,55360 34280,55360 34280,57210
GND on BottomLayer "BottomLayer-GND" (hatched 90Degree grid 20 track 20, remove dead copper, pour order 1): 31205,57210 31205,55040 31795,55040 31795,55365 32515,55365 32515,55040 32830,55040 32830,55365 32975,55365 32975,55110 33415,55110 33415,55195 33490,55195 33490,55110 33775,55110 33775,55360 34280,55360 34280,57210

## Keep-outs
KeepOutLayer:
  circle w10: c34165.94,57090 r59.05
  lines w7.87: 31203,55365.48 31203,57210 34280,57210 34280,55360.27 ; 33773.62,55360.27 34279.73,55360.27 34280,55360

## Silkscreen, mask and mechanical layers (free items; w line width, h text height)
TopOverlay:
  drawing of 2665 lines, arcs and shapes, not listed
  text "RI1" at 32300,57170 h20
  text "RTS1" at 32390,57170 h20
  text "GND" at 32495,57170 h20
  text "TX1" at 32595,57170 h20
  text "CD1" at 32700,57170 h20
  text "RI0" at 33150,57170 h20
  text "RTS0" at 33245,57170 h20
  text "GND" at 33350,57170 h20
  text "TX0" at 33450,57170 h20
  text "CD0" at 33550,57170 h20
  text "N.C" at 32300,56905 h20
  text "CTS1" at 32385,56905 h20
  text "DSR1" at 32490,56905 h20
  text "DTR1" at 32585,56905 h20
  text "RX1" at 32695,56905 h20
  text "N.C" at 33150,56905 h20
  text "CTS0" at 33240,56905 h20
  text "DSR0" at 33345,56905 h20
  text "DTR0" at 33445,56905 h20
  text "RX0" at 33555,56905 h20
  text "http://wch.cn" at 32790,56140 h50
  text "GND" at 34030,55400 h30
  text "CH382SSP@1208" at 31950,55390 h30
  text "GND" at 32930,55370 h30
  text "CKS" at 33030,55370 h30
  text "RST" at 33135,55370 h30
  text "+12V" at 32990,55240 h30
Mechanical1:
  circle w10: c34165.94,57090 r59.05
  lines w7.87: 31203,57208 31203,55365.48 31203,55040 31793.55,55040 31793.55,55365.48 32515.75,55365.48 32515.75,55040.68 32830.71,55040.68 32830.71,55040 ; 31203,57210 34280,57210 34280,55360.27 33773.62,55360.27 33773.62,54878 33759.62,54864 33759.62,54863.51 33504.26,54863.51 33490,54877.78 33490,55157.6 ; 33490.16,55157.6 ccw(c33452.75,55157.6) 33415.35,55157.6 33415.35,54878 33401.35,54864 32988.41,54864 32974.41,54878 32974.41,55293.85 ccw(c32902.56,55293.85) 32830.71,55293.85 32830.71,55040 ; 34279.73,55360.27 34280,55360 ; 32830.71,55040 32830.71,55040